# Altium PCB PCB1.PcbDoc
Units mm, origin at the board's own origin, x right, y up, seen from the top; angles counter-clockwise.
Board outline 39.68 x 41.13 mm, 2 copper layers (Top Layer, Bottom Layer), stack 2.036 mm thick; 33 components, 38 nets, 162 pads, 149 vias.
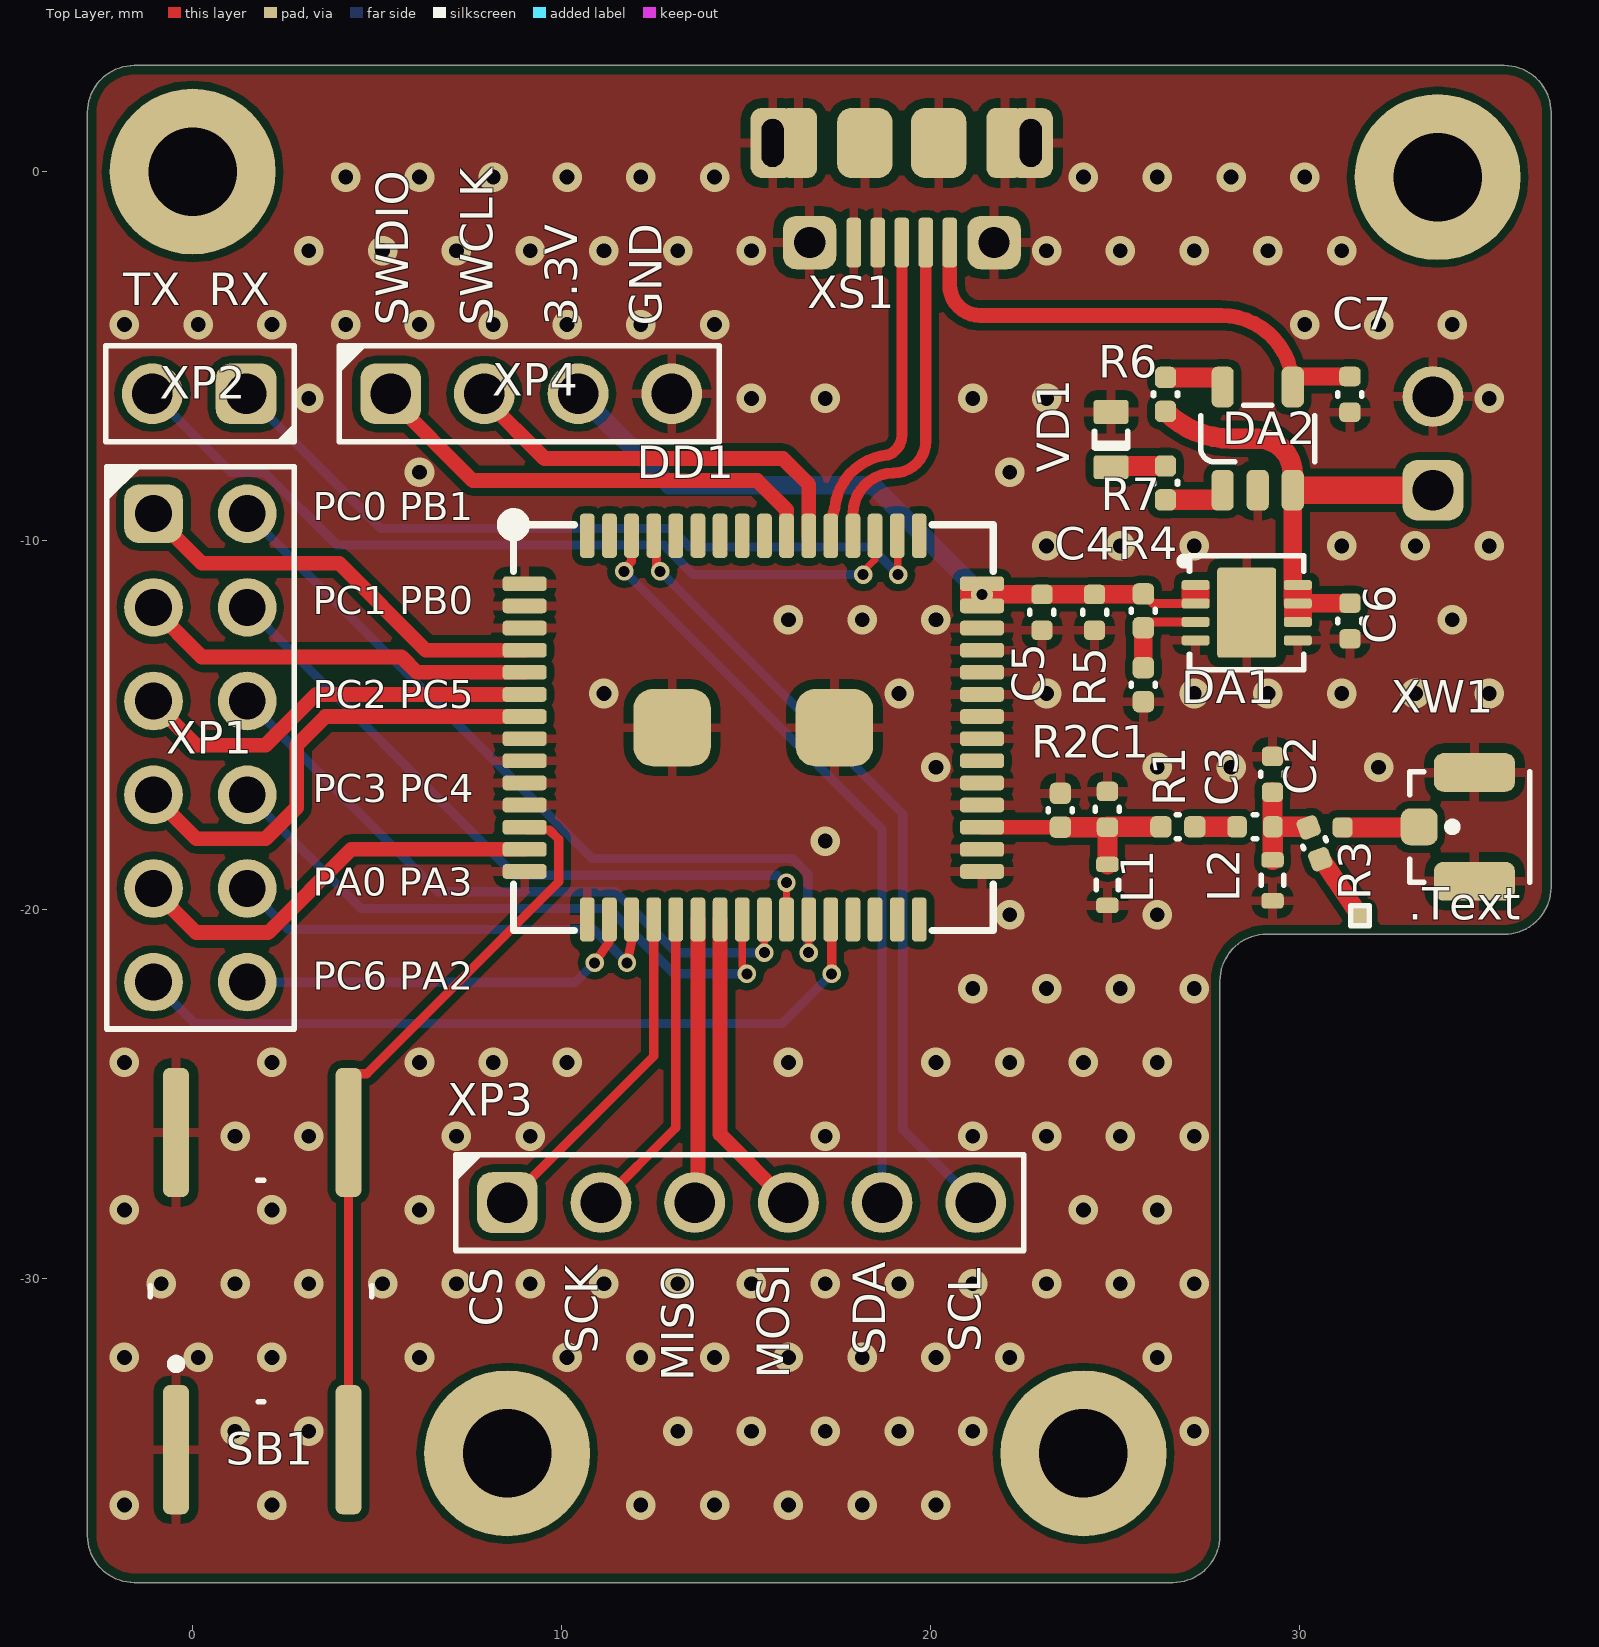
[diagram p0: Top Layer view]
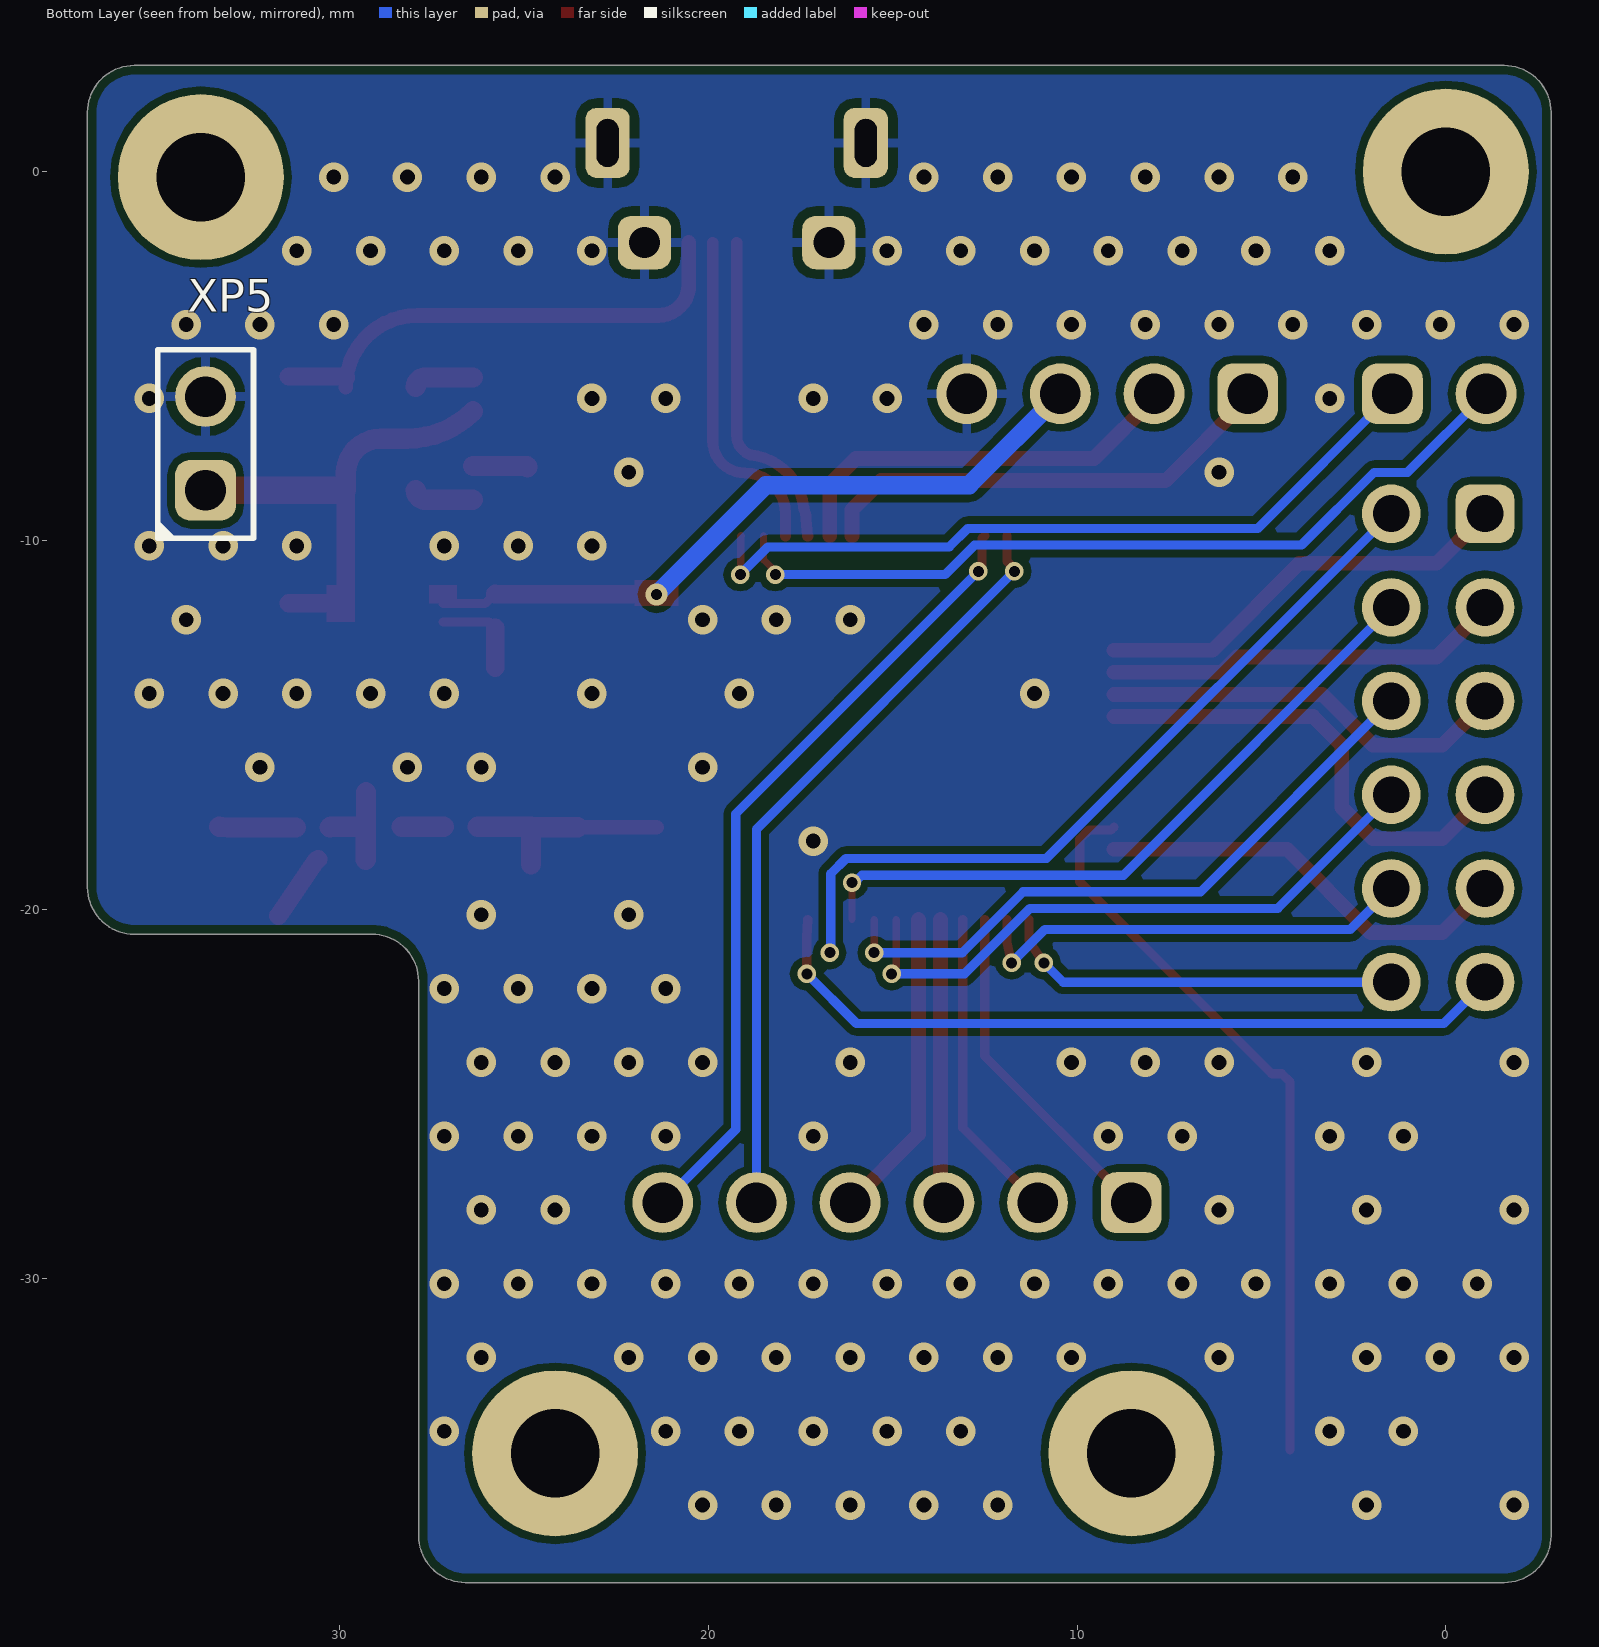
[diagram p1: Bottom Layer view, seen from below]
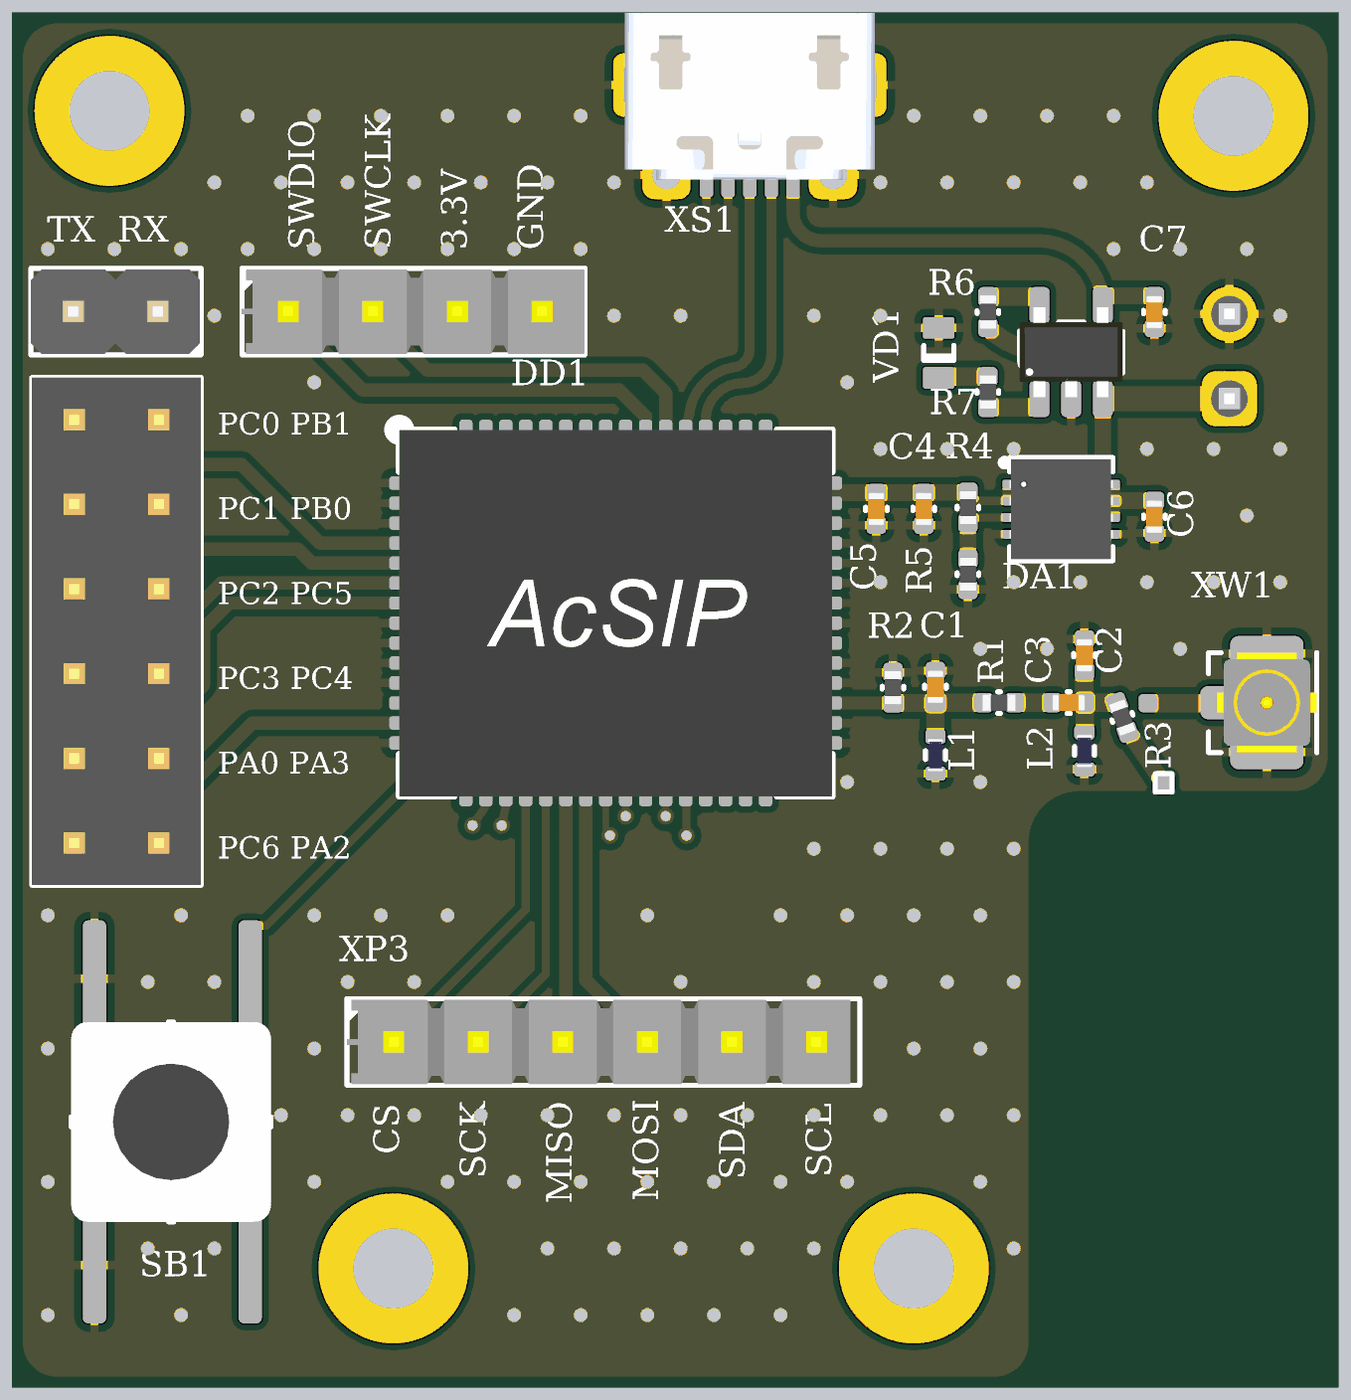
[diagram p2: 3D render of the assembled board from above, using the file's embedded part models]

## Layer stack, top to bottom
Top Solder: solder mask 0.035, Solder Resist, Dk 3.5
Top Layer: signal copper 0.018
Dielectric 1: core 2, FR4, Dk 4.6
Bottom Layer: signal copper 0.018
Bottom Solder: solder mask 0.035, Solder Resist, Dk 3.5

## Board outline
-1.58,-38.25 cw(c-1.58,-36.98) -2.85,-36.98 -2.85,1.605 cw(c-1.58,1.605) -1.58,2.875 35.555,2.875 cw(c35.555,1.605) 36.825,1.605 36.825,-19.405 cw(c35.555,-19.405) 35.555,-20.675 29.12,-20.675 ccw(c29.12,-21.945) 27.85,-21.945 27.85,-36.98 cw(c26.58,-36.98) 26.58,-38.25

## Design rules (kind name [scope] priority, off if disabled: settings)
BoardOutlineClearance SolderMask [OnSolderMask] p1: gap=0 ignorepadtopadclearanceinfootprint=FALSE except(0.25: Arc-CavityEdge Arc-SplitContinuation Track-CavityEdge Track-SplitContinuation SMDPad-CavityEdge SMDPad-SplitContinuation THPad-CavityEdge THPad-SplitContinuation Via-CavityEdge Via-SplitContinuation Fill-CavityEdge Fill-SplitContinuation Poly-CavityEdge Poly-SplitContinuation Region-CavityEdge Region-SplitContinuation Text-CavityEdge Text-SplitContinuation)
BoardOutlineClearance [All] p2: gap=0.25 ignorepadtopadclearanceinfootprint=FALSE
Clearance [All] p1: gap=0.2 ignorepadtopadclearanceinfootprint=FALSE
ComponentClearance [All] p1: gap=0.25 collisioncheckmode=3 verticalgap=0.25 showdistances=FALSE
DiffPairsRouting [All] p1: maxlimit=0.25 minlimit=0.25 mostfreqgap=0.25 toplayer_minwidth=0.2 toplayer_maxwidth=1 toplayer_prefwidth=0.4 bottomlayer_minwidth=0.2 bottomlayer_maxwidth=1 bottomlayer_prefwidth=0.4 maxuncoupledlength=10
HoleSize [All] p1: absolutevalues=TRUE maxlimit=8 minlimit=0.3 maxpercent=80.000 minpercent=20.000
HoleToHoleClearance [All] p1: gap=0.3 allowstackedmicrovias=TRUE
MinimumSolderMaskSliver [All] p1: minsoldermaskwidth=0.15
PlaneClearance [All] p1: clearance=0.5
PlaneConnect [All] p1: planeconnectstyle=Relief reliefexpansion=0.5 reliefentries=4 reliefconductorwidth=0.25 reliefairgap=0.25
PolygonConnect [All] p1: thpad.connectstyle=Relief thpad.reliefconductorwidth=0.25 thpad.reliefentries=4 thpad.polygonreliefangle="90 Angle" thpad.airgapwidth=0.25 smdpad.connectstyle=Relief smdpad.reliefconductorwidth=0.25 smdpad.reliefentries=4 smdpad.polygonreliefangle="90 Angle" smdpad.airgapwidth=0.25 via.connectstyle=Direct via.reliefconductorwidth=0.25 via.reliefentries=4 via.polygonreliefangle="90 Angle" via.airgapwidth=0.25
ReturnPath [All] p1: impedanceprofileid={2CF304FD-49DA-4276-8468-CD12DB598121} _gaplimit=0.5
RoomDefinition "МПСУ.464414.22-02 Sheet1" [InComponentClass('МПСУ.464414.22-02 Sheet1')] p1: confinementstyle=ConfineIn formatcopy=TRUE lockcomponents=FALSE outline -581.85,-718.15 -531.05,-718.15 -531.05,-692.75 -581.85,-692.75
RoutingCorners [All] p1: cornerstyle=45-Degree minsetback=2.5 maxsetback=2.5
RoutingVias [All] p1: holewidth=0.3 width=0.5 viastyle="Through Hole" minholewidth=0.3 minwidth=0.5 maxholewidth=1 maxwidth=1.5
SilkToSilkClearance [All] p1: silktosilkclearance=0.05
SilkToSolderMaskClearance [IsPad] p1: minsilkscreentomaskgap=0.05 clearancetoexposedcopper=TRUE
SolderMaskExpansion [All] p1: expansion=0.05 istentingtop=FALSE
UnRoutedNet [All] p1: checkbadconnections=TRUE
Width [All] p1: maxlimit=3 minlimit=0.2 preferedwidth=0.25
19 further rules are at their usual default settings.

## Classes and differential pairs
component class "МПСУ.464414.22-02 Sheet1": C1 C2 C3 C4 C5 C6 C7 DA1 DA2 DD1 L1 L2 R1 R2 R3 R4 R5 R6 R7 SB1 VD1 XP1 XP2 XP3 XP4 XP5 XS1 XW1

## Components (designator, comment, footprint, x,y, rotation, side; value= is the part's Value field where it differs from the comment)
C1 "TBD ± 0 % 0 В  0402" CAPC100X50X55L20N 24.8,-17.29 r90 top value=TBD
C2 "TBD ± 0 % 0 В  0402" CAPC100X50X55L20N 29.275,-16.34 r90 top value=TBD
C3 "56мкФ ± 0 % 0 В  0402" CAPC100X50X55L20N 28.8,-17.765 r180 top value=56мкФ
C4 "100 мкФ ± 0 % 0 В  0402" CAPC100X50X55L20N 24.45,-11.95 r90 top value="100 мкФ"
C5 "0.1 мкФ ± 0 % 0 В  0402" CAPC100X50X55L20N 23.025,-11.95 r270 top value="0.1 мкФ"
C6 "100 мкФ ± 0 % 0 В  0402" CAPC100X50X55L20N 31.375,-12.185 r270 top value="100 мкФ"
C7 "100 мкФ ± 0 % 0 В  0402" CAPC100X50X55L20N 31.374,-6.041 r90 top value="100 мкФ"
DA1 "LT1965*DD" SON9P50_300X300X80L40X25T244X160N 28.575,-11.96 r270 top
DA2 "MCP73831T-2ACI/OT" SOTFL95P270X145-5N 28.874,-7.241 r90 top
DD1 "" S7XS 15.2,-15.075 r0 top
L1 "TBD ± 0 % 0 А 0402" INDC100X50X60L10N 24.8,-19.34 r270 top value=TBD
L2 "TBD ± 0 % 0 А 0402" INDC100X50X60L10N 29.275,-19.215 r270 top value=TBD
R1 "0 Ом ± 0 % 0 Вт 0402" RESC100X50X40L25N 26.71,-17.765 r0 top value="0 Ом"
R2 "0 Ом ± 0 % 0 Вт 0402" RESC100X50X40L25N 23.525,-17.315 r90 top value="0 Ом"
R3 "0 Ом ± 0 % 0 Вт 0402" RESC100X50X40L25N 30.412,-18.212 r290 top value="0 Ом"
R4 "4,42 кОм ± 0 % 0 Вт 0402" RESC100X50X40L25N 25.775,-11.91 r270 top value="4,42 кОм"
R5 "3,01 кОм ± 0 % 0 Вт 0402" RESC100X50X40L25N 25.775,-13.91 r270 top value="3,01 кОм"
R6 "5 кОм ± 0 % 0 Вт 0402" RESC100X50X40L25N 26.374,-6.041 r270 top value="5 кОм"
R7 "470 Ом ± 0 % 0 Вт 0402" RESC100X50X40L25N 26.374,-8.441 r90 top value="470 Ом"
SB1 "" KLS7-TS6601 1.85,-30.35 r90 top
VD1 "KP-1608ZGC" KP-1608ZGC 24.899,-7.266 r90 top
X2 "Contact Pad" "Contact_Pad 0.55x0.55" 31.65,-20.175 r0 top
XP1 "DS1021-2x6SF11-B" HDRV12W64P254_6X2_1524X508H600 0.21,-15.625 r270 top
XP2 "TSW-102-07-G-S" TSW-102-07-G-S 1.45,-6.025 r180 top
XP3 "TSW-106-07-G-S" TSW-106-07-G-S 16.15,-27.95 r0 top
XP4 "TSW-104-07-G-S" TSW-104-07-G-S 9.18,-6.025 r0 top
XP5 "TSW-102-07-G-S" TSW-102-07-G-S 33.625,-8.64 r90 bottom
XS1 "10118194-0001LF" micro_USB_TH 19.225,0.175 r180 top
XW1 "U.FL-LP*" U.FL-LP 34.75,-17.765 r270 top
? "Comment" M2_Hole 24.15,-34.75 r0 top
? "Comment" M2_Hole 33.75,-0.15 r0 top
? "Comment" M2_Hole 0,0 r0 top
? "Comment" M2_Hole 8.525,-34.75 r0 top

## Footprints (in the part's own frame and the unit in brackets; to place one, negate y for a bottom-side part, rotate by r counter-clockwise, add the part's x,y. Pads: shape width x height; smd on the part's side, far side on the other; paste and mask are expansions set on the pad)
CAPC100X50X55L20N [mm] "Capacitor, Chip; 1.00 mm L X 0.50 mm W X 0.55 mm H body"
  rrect50% 0.53x0.58 smd: 1(-0.485,0) 2(0.485,0)
  silkscreen extent -0.05,-0.33 0.05,0.33, body extent -0.5,-0.25 0.5,0.25, height 0.55
"Contact_Pad 0.55x0.55" [mm]
  rrect50% 0.55x0.55 smd mask+0.1: 1(0,0)
  silkscreen extent -0.25,-0.28 0.25,0.28
HDRV12W64P254_6X2_1524X508H600 [mm] "Header, Vertical, 2.54 mm pitch; 0.64 mm lead width, 12 pins, 2 rows, 6 pins per row, 15.24 mm L X 5.08 mm W X 6.00 mm H body"
  rrect50% 1.59x1.59 hole 1: 1(-6.35,-1.27)
  round 1.59 hole 1: 2(-6.35,1.27) 3(-3.81,-1.27) 4(-3.81,1.27) 5(-1.27,-1.27) 6(-1.27,1.27) 7(1.27,-1.27) 8(1.27,1.27) 9(3.81,-1.27) 10(3.81,1.27) 11(6.35,-1.27) 12(6.35,1.27)
  silkscreen extent -7.62,-2.54 7.62,2.54, body extent -7.62,-2.54 7.62,2.54, height 6
INDC100X50X60L10N [mm] "Inductor, Chip; 1.00 mm L X 0.50 mm W X 0.60 mm H body"
  rrect50% 0.42x0.61 smd: 1(-0.555,0) 2(0.555,0)
  silkscreen extent -0.13,-0.3 0.13,0.3, body extent -0.5,-0.25 0.5,0.25, height 0.6
KLS7-TS6601 [mm] "Button"
  rrect50% 3.5x0.7 smd: 1(-4.3,2.3) 1(4.3,2.3) 2(-4.3,-2.376) 2(4.3,-2.376)
  silkscreen extent -3,-3 3,3, body extent -3,-3 3,3, height 13
KP-1608ZGC [mm] "SODFL, 2-Leads, Body 0,80x1,60mm, IPC Medium Density"
  rrect25% 0.65x0.95 smd: 1(-0.75,0) 2(0.75,0)
  silkscreen extent -0.3,-0.45 0.23,0.45, body extent -0.8,-0.37 0.8,0.38, height 1.1
M2_Hole [mm]
  round 4.5 / inner round 3.4 / far side round 4.5 hole 2.4: 1(0,0)
  body extent -1.9,-1.9 1.9,1.9, height 1.3
micro_USB_TH [mm]
  rrect50% 0.4x1.35 smd: 1(-1.3,2.1) 2(-0.65,2.1) 3(0,2.1) 4(0.65,2.1) 5(1.3,2.1)
  rrect50% 1.2x1.9 hole 1.3 slot 0.6 at 0 deg: 5(-3.5,-0.6) 5(3.5,-0.6)
  rrect50% 1x1.9 smd: 5(-2.8,-0.6) 5(2.8,-0.6)
  rrect50% 1.45x1.45 hole 0.85: 5(-2.5,2.1) 5(2.5,2.1)
  rrect50% 1.5x1.9 smd: 5(-1,-0.6) 5(1,-0.6)
  body extent -3.75,-2.77 3.75,2.24, height 2.64
RESC100X50X40L25N [mm] "Resistor, Chip; 1.00 mm L X 0.50 mm W X 0.40 mm H body"
  rrect50% 0.58x0.58 smd: 1(-0.46,0) 2(0.46,0)
  silkscreen extent -0.04,-0.33 0.04,0.33, body extent -0.5,-0.25 0.5,0.25, height 0.4
S7XS [mm] "S7XS"
  rrect50% 1.2x0.4 smd mask-0.05: 1(-6.2,3.9) 2(-6.2,3.3) 3(-6.2,2.7) 4(-6.2,2.1) 5(-6.2,1.5) 6(-6.2,0.9) 7(-6.2,0.3) 8(-6.2,-0.3) 9(-6.2,-0.9) 10(-6.2,-1.5) 11(-6.2,-2.1) 12(-6.2,-2.7) 13(-6.2,-3.3) 14(-6.2,-3.9) 31(6.2,-3.9) 32(6.2,-3.3) 33(6.2,-2.7) 34(6.2,-2.1) 35(6.2,-1.5) 36(6.2,-0.9) 37(6.2,-0.3) 38(6.2,0.3) 39(6.2,0.9) 40(6.2,1.5) 41(6.2,2.1) 42(6.2,2.7) 43(6.2,3.3) 44(6.2,3.9)
  rrect50% 0.4x1.2 smd mask-0.05: 15(-4.5,-5.2) 16(-3.9,-5.2) 17(-3.3,-5.2) 18(-2.7,-5.2) 19(-2.1,-5.2) 20(-1.5,-5.2) 21(-0.9,-5.2) 22(-0.3,-5.2) 23(0.3,-5.2) 24(0.9,-5.2) 25(1.5,-5.2) 26(2.1,-5.2) 27(2.7,-5.2) 28(3.3,-5.2) 29(3.9,-5.2) 30(4.5,-5.2) 45(4.5,5.2) 46(3.9,5.2) 47(3.3,5.2) 48(2.7,5.2) 49(2.1,5.2) 50(1.5,5.2) 51(0.9,5.2) 52(0.3,5.2) 53(-0.3,5.2) 54(-0.9,5.2) 55(-1.5,5.2) 56(-2.1,5.2) 57(-2.7,5.2) 58(-3.3,5.2) 59(-3.9,5.2) 60(-4.5,5.2)
  rrect50% 2.1x2.1 smd mask-0.05: 61(-2.2,0) 62(2.2,0)
  silkscreen extent -6.7,-5.5 6.5,5.7, body extent -6.5,-5.5 6.5,5.5, height 1.14
SON9P50_300X300X80L40X25T244X160N [mm] "Small Outline No-Lead (SON with Tab), 0.50 mm pitch; 8 pin, 3.00 mm L X 3.00 mm W X 0.80 mm H body"
  rrect50% 0.27x0.76 smd: 1(-0.75,-1.385) 2(-0.25,-1.385) 3(0.25,-1.385) 4(0.75,-1.385) 5(0.75,1.385) 6(0.25,1.385) 7(-0.25,1.385) 8(-0.75,1.385)
  rrect10% 2.44x1.6 smd: 9(0,0)
  silkscreen extent -1.55,-1.78 1.55,1.55, body extent -1.5,-1.55 1.5,1.55, height 0.8
SOTFL95P270X145-5N [mm] "SOTFL, 5-Leads, Body 2,90x2,70mm, Pitch 0,95mm, IPC Medium Density"
  rrect50% 1.1x0.6 smd: 1(-1.4,0.95) 2(-1.4,0) 3(-1.4,-0.95) 4(1.4,-0.95) 5(1.4,0.95)
  silkscreen extent -0.63,-1.55 0.9,1.55, body extent -1.35,-1.55 1.35,1.55, height 1.45
TSW-102-07-G-S [mm]
  rrect50% 1.65x1.65 hole 1.1: 1(0,0)
  round 1.65 hole 1.1: 2(2.54,0)
  silkscreen extent -1.3,-1.3 3.81,1.3, body extent -1.27,-1.27 3.81,1.27, height 8.38
TSW-104-07-G-S [mm]
  rrect50% 1.65x1.65 hole 1.1: 1(-3.81,0)
  round 1.65 hole 1.1: 2(-1.27,0) 3(1.27,0) 4(3.81,0)
  silkscreen extent -5.2,-1.3 5.1,1.3, body extent -5.21,-1.27 5.08,1.27, height 8.38
TSW-106-07-G-S [mm]
  rrect50% 1.65x1.65 hole 1.1: 1(-7.62,0)
  round 1.65 hole 1.1: 2(-5.08,0) 3(-2.54,0) 4(0,0) 5(2.54,0) 6(5.08,0)
  silkscreen extent -9.02,-1.3 6.38,1.3, body extent -9.02,-1.27 6.1,1.27, height 8.38
U.FL-LP [mm]
  rrect50% 1x1 smd: 1(0,-1.5)
  rrect50% 1.05x2.2 smd: 2(-1.475,0) 2(1.475,0)
  silkscreen extent -1.5,-1.75 1.5,1.5, body extent -1.5,-1.5 1.5,1.5, height 1.25

## Part data
C1 C2 C3 C4 C5 C6 C7: library part "C 0402", "Capacitor 0402", Package=0402, Tolerance="0 %", 3D_Body=+, Category=Passive, Designer=Свидерский, Peak_Condition="0 В", Status=Approved, Subcategory=Capacitor
DA1: "1.1A, Low Noise,  Low Dropout Linear Regulator", Manufacturer="Analog Devices", Package="8-LEAD (3mm × 3mm) PLASTIC DFN", 3D_Body=+, Category=IC, ComponentLink1Description="Техническое описание", ComponentLink1URL=Q:\Libs\Descriptions_PDF\LT1965.pdf, Designer=Свидерский, PartNumber=LT1965*DD, Status=Approved, Subcategory="Power Supply"
DA2: library part MCP7383*, "Miniature Single-Cell, Fully Integrated Li-Ion, / Li-Polymer Charge Management Controllers", Manufacturer=Microchip, 3D_Body=+, Category=IC, ComponentLink1Description="Техническое описание", ComponentLink1URL=Q:\Libs\Descriptions_PDF\KLS7-TS6601.pdf, Designer=Лазба, PartNumber=MCP73831T-2ACI/OT, Status=Check, Subcategory="Power Supply"
DD1: library part S76S, "The S76S is designed & manufactured in a smallest form factor - SiP ( System in Package ). It integrate with Semtech SX1276 and a 32-bit ultra low power Cortex M0L MCU ( STM32L073x ), supporting global 863MHz ~ 928MHz ISM-Bands.", Manufacturer=AcSIP, 3D_Body=+, Category=IC, ComponentLink1Description="Техническое описание", ComponentLink1URL="Q:\Libs\Descriptions_PDF\AcSIP S76S.pdf", Designer=Лазба, PartNumber=S76S, Status=Check, Subcategory=MCU
L1 L2: library part "L 0402", "Inductor 0402", Package=0402, Tolerance="0 %", 3D_Body=+, Category=Passive, Designer=Свидерский, Peak_Condition="0 А", Status=Approved, Subcategory=Inductor
R1 R2 R3 R4 R5 R6 R7: library part "R 0402", "Resistor 0402", Package=0402, Tolerance="0 %", 3D_Body=+, Category=Passive, Designer=Свидерский, Peak_Condition="0 Вт", Status=Approved, Subcategory=Resistor
SB1: library part KLS7-TS6601*, "6x6 Tact Switch Series", Manufacturer="KLS electronic co ltd", 3D_Body=+, Category=Passive, ComponentLink1Description="Техническое описание", ComponentLink1URL=Q:\Libs\Descriptions_PDF\KLS7-TS6601.pdf, Designer=Лазба, PartNumber=KLS7-TS6601*, Status=Check, Subcategory=Button
VD1: library part KP-1608***, "1.6X0.8mm SMD CHIP LED LAMP", Manufacturer=Kingbright, Package="1.6mmX0.8mm SMD LED", 3D_Body=+, Category=Discrete, ComponentLink1Description="Техническое описание", ComponentLink1URL=Q:\Libs\Descriptions_PDF\KP-1608ZGC.pdf, Designer=Ушакова, PartNumber=KP-1608ZGC, Status=Approved, Subcategory=Diode
X2: "Контактная площадка (1,5 х 1,5 мм) для запайки провода", 3D_Body=+, Category=Primitive, Designer=Свидерский, Status=Approved, Subcategory=Pad
XP1: "Вилка 2,54мм", Manufacturer="Connfly Electronic", 3D_Body=+, Category=Connector, ComponentLink1Description="Техническое описание", ComponentLink1URL=Q:\Libs\Descriptions_PDF\DS1021.pdf, Designer=Свидерский, PartNumber=DS1021-2x6SF11-B, Pins=2x6, Pitch=2.54mm, Status=Approved, Subcategory=Male, System=Connector
XP2 XP5: "2x1 Вилка 2,54 мм", Manufacturer=Samtec, 3D_Body=+, Category=Connector, ComponentLink1Description="Техническое описание", ComponentLink1URL=Q:\Libs\Descriptions_PDF\tsw_th.pdf, Designer=Погорельский, PartNumber=TSW-102-07-G-S, Pins=2х1, Pitch=2.54mm, Status=Check, Subcategory=Male, System=Connector
XP3 XP4: "Вилка 2,54 мм", Manufacturer=Samtec, 3D_Body=+, Category=Connector, ComponentLink1Description="Техническое описание", ComponentLink1URL=Q:\Libs\Descriptions_PDF\tsw_th.pdf, Pitch=2.54mm, Status=Check, Subcategory=Male, System=Connector
  XP3: Designer=Лазба, PartNumber=TSW-106-07-G-S, Pins=1x6
  XP4: Designer=Затонская, PartNumber=TSW-104-07-G-S, Pins=1x4
XS1: "micro USB, Through Hole Mount", Manufacturer="Amphenal ICC", 3D_Body=+, Category=Connector, ComponentLink1Description="Техническое описание", ComponentLink1URL=Q:\Libs\Descriptions_PDF\10118194-0001LF.pdf, Designer=Свидерский, PartNumber=10118194-0001LF, Pins=5, Pitch=-, Status=Approved, Subcategory=microUSB, System=Connector
XW1: library part U.FL-R-SMT, "RF connector, Right Angle Jack PCB SMA Female End Launch Connector", Manufacturer="Hirose Electric", 3D_Body=+, Category=Connector, ComponentLink1Description="Техническое описание", ComponentLink1URL=Q:\Libs\Descriptions_PDF\32K243-40ML5.pdf, Designer=Лазба, PartNumber=U.FL-LP*, Pins=UFL, Status=Check, Subcategory=RF, System=Connector

## Free pads (board coordinates)
  rrect50% 0.55x0.55 smd: 1(31.175,-17.78)

## Via types
v1: diameter 0.8, hole 0.4, Top Layer to Bottom Layer, tented both sides, 137 vias
v2: diameter 0.5, hole 0.3, Top Layer to Bottom Layer, tented both sides, 11 vias
v3: diameter 0.6, hole 0.3, Top Layer to Bottom Layer, tented both sides, 1 vias

## Nets (pads, with @x,y where several pads share a name; then routed paths per layer and width w, separated by ;. In a path a pad name is that pad's centre, name@x,y a point inside that pad or via, vN(x,y) a via of type N, cw(c..) or ccw(c..) an arc to the next point about the centre after c; other vN are vias at no path point)
ACC_V: C6.1 DA1.6 DA1.7 DA1.8 DA2.3 R6.2 XP5.1 | length 12.6
  Top Layer w0.2: DA1.7 DA1.7@29.965,-11.705 ; C6.1@31.37,-11.705 C6.1
  Top Layer w0.5: DA2.3 29.824,-10.507 29.825,-10.508 DA1.7@29.825,-11.71 ; DA1.7@29.965,-11.705 C6.1@31.37,-11.705
  Top Layer w0.55: R6.2 ccw(c28.16,-4.715) 28.16,-7.241 28.874,-7.241 cw(c28.874,-8.191) 29.824,-8.191 DA2.3
  Top Layer w0.75: 30.124,-8.64 XP5.1
GND: C1.2 C2.2 C4.1 C5.2 C6.2 C7.1 DA1.4 DA1.5 DA1.9 DA2.2 DD1.1 DD1.2 DD1.3 DD1.8 DD1.9 DD1.10 DD1.11 DD1.14 DD1.15 DD1.31 DD1.32 DD1.34 DD1.35 DD1.37 DD1.38 DD1.39 DD1.40 DD1.41 DD1.42 DD1.61 DD1.62 L1.2 L2.2 R2.2 R5.2 SB1.1 VD1.2 XP4.4 XP5.2 XS1.4 XS1.5 XW1.2
  other v1: -1.85,-36.15 2.15,-36.15 12.15,-36.15 14.15,-36.15 16.15,-36.15 18.15,-36.15 20.15,-36.15 1.15,-34.15 3.15,-34.15 13.15,-34.15 15.15,-34.15 17.15,-34.15 19.15,-34.15 21.15,-34.15 27.15,-34.15 -1.85,-32.15 0.15,-32.15 2.15,-32.15 6.15,-32.15 10.15,-32.15 12.15,-32.15 14.15,-32.15 16.15,-32.15 18.15,-32.15 20.15,-32.15 22.15,-32.15 26.15,-32.15 -0.85,-30.15 1.15,-30.15 3.15,-30.15 5.15,-30.15 7.15,-30.15 9.15,-30.15 11.15,-30.15 13.15,-30.15 15.15,-30.15 17.15,-30.15 19.15,-30.15 21.15,-30.15 23.15,-30.15 25.15,-30.15 27.15,-30.15 -1.85,-28.15 2.15,-28.15 6.15,-28.15 24.15,-28.15 26.15,-28.15 1.15,-26.15 3.15,-26.15 7.15,-26.15 9.15,-26.15 17.15,-26.15 21.15,-26.15 23.15,-26.15 25.15,-26.15 27.15,-26.15 -1.85,-24.15 2.15,-24.15 6.15,-24.15 8.15,-24.15 10.15,-24.15 16.15,-24.15 20.15,-24.15 22.15,-24.15 24.15,-24.15 26.15,-24.15 21.15,-22.15 23.15,-22.15 25.15,-22.15 27.15,-22.15 22.15,-20.15 26.15,-20.15 17.15,-18.15 20.15,-16.15 26.15,-16.15 28.15,-16.15 32.15,-16.15 11.15,-14.15 19.15,-14.15 23.15,-14.15 27.15,-14.15 29.15,-14.15 31.15,-14.15 33.15,-14.15 35.15,-14.15 16.15,-12.15 18.15,-12.15 20.15,-12.15 34.15,-12.15 23.15,-10.15 25.15,-10.15 27.15,-10.15 31.15,-10.15 33.15,-10.15 35.15,-10.15 6.15,-8.15 22.15,-8.15 3.15,-6.15 15.15,-6.15 17.15,-6.15 21.15,-6.15 23.15,-6.15 35.15,-6.15 -1.85,-4.15 0.15,-4.15 2.15,-4.15 4.15,-4.15 6.15,-4.15 8.15,-4.15 10.15,-4.15 12.15,-4.15 14.15,-4.15 30.15,-4.15 32.15,-4.15 34.15,-4.15 3.15,-2.15 5.15,-2.15 7.15,-2.15 9.15,-2.15 11.15,-2.15 13.15,-2.15 15.15,-2.15 23.15,-2.15 25.15,-2.15 27.15,-2.15 29.15,-2.15 31.15,-2.15 4.15,-0.15 6.15,-0.15 8.15,-0.15 10.15,-0.15 12.15,-0.15 14.15,-0.15 24.15,-0.15 26.15,-0.15 28.15,-0.15 30.15,-0.15
NetC1_1: C1.1 DD1.33 L1.1 R1.1 R2.1 | length 5.9
  Top Layer w0.4: DD1.33 R2.1
  Top Layer w0.55: R2.1 C1.1 L1.1 ; C1.1@24.8,-17.765 R1.1
NetC2_1: C2.1 C3.1 L2.1 R3.1 | length 2.8
  Top Layer w0.55: L2.1 29.285,-18.66 C3.1 ; C2.1 29.275,-17.765 C3.1 ; R3.1 30.24,-17.765 C3.1
NetC3_2: C3.2 R1.2 | length 1.1
  Top Layer w0.55: R1.2 C3.2
NetC7_2: C7.2 DA2.4 XS1.1 | length 13.9
  Top Layer w0.4: XS1.1 20.525,-3.075 ccw(c21.35,-3.075) 21.35,-3.9 27.883,-3.9 cw(c27.883,-5.841) DA2.4 DA2.4@29.824,-5.591
  Top Layer w0.5: DA2.4@29.824,-5.591 29.824,-5.556 C7.2
NetDA1_3: DA1.3 R4.2 R5.1 | length 2.6
  Top Layer w0.25: R4.2 25.935,-12.21 DA1.3
  Top Layer w0.5: R5.1 R4.2
NetDA2_1: DA2.1 R7.1 | length 1.7
  Top Layer w0.55: R7.1 27.664,-8.901 ccw(c27.664,-8.641) DA2.1
NetDA2_5: DA2.5 R6.1 | length 1.7
  Top Layer w0.55: R6.1 27.664,-5.581 cw(c27.664,-5.841) DA2.5
NetDD1_4: DD1.4 XP1.1 | length 11.6
  Top Layer w0.4: XP1.1@-1.095,-9.275 0.25,-10.62 3.97,-10.62 6.325,-12.975 DD1.4
NetDD1_5: DD1.5 XP1.3 | length 10.8
  Top Layer w0.4: XP1.3@-1.095,-11.815 0.25,-13.16 5.661,-13.16 6.076,-13.575 DD1.5
NetDD1_6: DD1.6 XP1.5 | length 11.2
  Top Layer w0.4: XP1.5@-1.095,-14.355 0.1,-15.55 1.975,-15.55 3.35,-14.175 8.541,-14.175 8.751,-14.175 DD1.6
NetDD1_7: DD1.7 XP1.7 | length 13
  Top Layer w0.4: XP1.7@-1.095,-16.895 0.1,-18.09 1.975,-18.09 2.825,-17.24 2.825,-15.549 3.599,-14.775 DD1.7
NetDD1_12: DD1.12 SB1.2 | length 20.1
  Top Layer w0.25: SB1.2@4.226,-34.65 4.226,-26.05 4.226,-24.677 4.447,-24.456 4.72,-24.456 9.925,-19.251 9.925,-18.099 9.676,-17.85 9.075,-17.85 DD1.12
NetDD1_13: DD1.13 XP1.9 | length 11.5
  Top Layer w0.4: XP1.9@-1.095,-19.435 0.1,-20.63 2.045,-20.63 4.3,-18.375 DD1.13
NetDD1_18: DD1.18 XP3.1 | length 9.3
  Top Layer w0.25: XP3.1 12.5,-23.98 DD1.18
NetDD1_19: DD1.19 XP3.2 | length 8.5
  Top Layer w0.25: XP3.2 13.1,-25.92 DD1.19
NetDD1_20: DD1.20 XP3.3 | length 7.7
  Top Layer w0.4: XP3.3 13.7,-27.86 DD1.20
NetDD1_21: DD1.21 XP3.4 | length 8.4
  Top Layer w0.4: DD1.21 14.3,-20.734 14.3,-26.1 XP3.4
NetDD1_46: DD1.46 XP2.1 | length 20.8
  Top Layer w0.2: DD1.46 19.112,-9.888 19.112,-10.912 v2(19.125,-10.925)
  Bottom Layer w0.25: XP2.1 5.1,-9.675 12.962,-9.675 13.462,-10.175 18.375,-10.175 v2(19.125,-10.925)
NetDD1_47: DD1.47 XP2.2 | length 22.5
  Top Layer w0.2: v2(18.175,-10.925) 18.175,-10.844 18.5,-10.519 DD1.47
  Bottom Layer w0.25: XP2.2 1.04,-8.155 1.944,-8.155 3.914,-10.125 12.776,-10.125 13.576,-10.925 v2(18.175,-10.925)
NetDD1_57: DD1.57 XP3.6 | length 21.7
  Top Layer w0.25: DD1.57 12.575,-9.95 12.575,-10.67 12.675,-10.77 v2(12.675,-10.838)
  Bottom Layer w0.25: v2(12.675,-10.838) 19.25,-17.413 19.25,-25.97 XP3.6
NetDD1_58: DD1.58 XP3.5 | length 21.1
  Top Layer w0.25: v2(11.697,-10.838) 11.697,-10.77 11.9,-10.567 DD1.58
  Bottom Layer w0.25: v2(11.697,-10.838) 18.69,-17.83 XP3.5
NetR3_2: R3.2 X2.1 | length 1.9
  Top Layer w0.5: R3.2 30.621,-18.668 31.625,-20.15 X2.1
NetR7_2: R7.2 VD1.1 | length 1.5
  Top Layer w0.55: VD1.1 cw(c24.934,-8.016) 24.934,-7.981 R7.2
NetX1_1: pad.1 XW1.1 | length 2.1
  Top Layer w0.55: pad.1 33.025,-17.78 XW1.1
PA2: DD1.16 XP1.12 | length 10.9
  Top Layer w0.25: v2(10.9,-21.45) 11.255,-20.939 ccw(c11.05,-20.797) 11.3,-20.797 11.3,-20.75 DD1.16
  Bottom Layer w0.25: XP1.12 10.375,-21.975 v2(10.9,-21.45)
PA3: DD1.17 XP1.10 | length 12.3
  Top Layer w0.25: v2(11.775,-21.45) 11.894,-20.901 ccw(c11.65,-20.848) 11.9,-20.848 11.9,-20.75 DD1.17
  Bottom Layer w0.25: XP1.10 2.59,-20.545 10.87,-20.545 v2(11.775,-21.45)
PB0: DD1.24 XP1.4 | length 18.7
  Top Layer w0.2: DD1.24 v2(16.1,-19.275)
  Bottom Layer w0.25: XP1.4 8.74,-19.075 15.832,-19.075 16.032,-19.275 v2(16.1,-19.275)
PB1: DD1.25 XP1.2 | length 22.3
  Top Layer w0.2: v2(16.7,-21.175) DD1.25
  Bottom Layer w0.25: XP1.2 10.83,-18.625 16.263,-18.625 16.675,-19.037 16.675,-21.15 v2(16.7,-21.175)
PC4: DD1.22 XP1.8 | length 17.1
  Top Layer w0.2: DD1.22 14.9,-21.544 15.025,-21.669 v2(15.025,-21.75)
  Bottom Layer w0.25: XP1.8 4.56,-19.975 11.275,-19.975 13.05,-21.75 v2(15.025,-21.75)
PC5: DD1.23 XP1.6 | length 17.7
  Top Layer w0.2: v2(15.5,-21.175) DD1.23
  Bottom Layer w0.25: XP1.6 6.65,-19.525 11.461,-19.525 13.111,-21.175 v2(15.5,-21.175)
PC6: DD1.26 XP1.11 | length 20.9
  Top Layer w0.25: DD1.26 17.325,-20.75 v2(17.325,-21.75)
  Bottom Layer w0.25: XP1.11 0.06,-23.095 15.98,-23.095 v2(17.325,-21.75)
SWCLK: DD1.50 XP4.2 | length 11.2
  Top Layer w0.4: XP4.2@7.91,-6.15 9.539,-7.779 16.004,-7.779 16.7,-8.475 DD1.50
SWDIO: DD1.51 XP4.1 | length 12.7
  Top Layer w0.4: XP4.1@5.37,-6.15 7.599,-8.379 15.311,-8.379 16.1,-9.168 DD1.51
USB_DM: DD1.48 XS1.2 | length 9.1
  Top Layer w0.3: DD1.48 17.9,-9.275 cw(c19,-9.275) 19,-8.175 ccw(c19,-7.3) 19.875,-7.3 XS1.2
USB_DP: DD1.49 XS1.3 | length 8.9
  Top Layer w0.3: DD1.49 17.35,-9.425 17.35,-9.375 cw(c17.8,-9.375) 17.386,-9.198 ccw(c17.11,-9.081) 17.408,-9.112 cw(c19,-9.275) 18.672,-7.709 cw(c19,-9.275) 18.808,-7.687 ccw(c18.771,-7.389) 18.886,-7.666 ccw(c18.672,-7.156) 19.225,-7.156 XS1.3
VDD33: C4.2 C5.1 DA1.1 DA1.2 DD1.43 DD1.44 R4.1 XP4.3 | length 19.1
  Top Layer w0.25: R4.1 25.786,-11.45 26.046,-11.71 DA1.2
  Top Layer w0.5: v3(21.4,-11.465) C5.1 C4.2 24.458,-11.457 25.767,-11.457 R4.1
  Bottom Layer w0.5: XP4.3 12.925,-8.5 18.435,-8.5 v3(21.4,-11.465)
pads on no net: ?.1 DD1.27 DD1.28 DD1.29 DD1.30 DD1.36 DD1.45 DD1.52 DD1.53 DD1.54 DD1.55 DD1.56 DD1.59 DD1.60

## Polygon pours and split planes (outlines as drawn)
GND on Bottom Layer "GND_L02_P001" (solid, pour order 1): -1.58,-38.25 cw(c-1.58,-36.98) -2.85,-36.98 -2.85,1.605 cw(c-1.58,1.605) -1.58,2.875 35.555,2.875 cw(c35.555,1.605) 36.825,1.605 36.825,-20.225 cw(c36.375,-20.225) 36.375,-20.675 28.75,-20.675 ccw(c28.75,-21.575) 27.85,-21.575 27.85,-36.98 cw(c26.58,-36.98) 26.58,-38.25
GND on Top Layer "GND_L01_P000" (solid, pour order 0): -1.58,-38.25 cw(c-1.58,-36.98) -2.85,-36.98 -2.85,1.605 cw(c-1.58,1.605) -1.58,2.875 35.555,2.875 cw(c35.555,1.605) 36.825,1.605 36.825,-20.225 cw(c36.375,-20.225) 36.375,-20.675 28.75,-20.675 ccw(c28.75,-21.575) 27.85,-21.575 27.85,-36.98 cw(c26.58,-36.98) 26.58,-38.25

## Other copper
Top Layer:
  rectangle net VDD33: 20.8,-11.775 22,-11.075
  rectangle net VDD33: 26.81,-11.71 27.57,-11.21
  rectangle net ACC_V: 29.58,-12.21 30.34,-11.21

## Silkscreen, mask and mechanical layers (free items; w line width, h text height)
Top Overlay:
  text "TX  RX" at -1.875,-3.925 h1.5
  text "SWDIO" at 6.139,-4.175 h1.5 r90
  text "SWCLK" at 8.431,-4.175 h1.5 r90
  text "3.3V" at 10.722,-4.175 h1.5 r90
  text "GND" at 13.014,-4.175 h1.5 r90
  text "PC0 PB1" at 3.25,-9.715 h1.3
  text "PC1 PB0" at 3.25,-12.26 h1.3
  text "PC2 PC5" at 3.25,-14.805 h1.3
  text "PC3 PC4" at 3.25,-17.35 h1.3
  text "PA0 PA3" at 3.25,-19.895 h1.3
  text "PC6 PA2" at 3.25,-22.44 h1.3
  text "CS" at 8.689,-31.322 h1.5 r90
  text "SCL" at 21.664,-32.005 h1.5 r90
  text "SCK" at 11.284,-32.043 h1.5 r90
  text "SDA" at 19.069,-32.086 h1.5 r90
  text "MOSI" at 16.474,-32.728 h1.5 r90
  text "MISO" at 13.879,-32.8 h1.5 r90
Board Outline:
  lines w0.15: 29.12,-20.675 ccw(c29.12,-21.945) 27.85,-21.945 27.85,-21.95 27.85,-36.98 cw(c26.58,-36.98) 26.58,-38.25 -1.58,-38.25 cw(c-1.58,-36.98) -2.85,-36.98 -2.85,1.605 cw(c-1.58,1.605) -1.58,2.875 35.555,2.875 cw(c35.555,1.605) 36.825,1.605 36.825,-18.95 36.825,-19.4 36.825,-19.405 cw(c35.555,-19.405) 35.555,-20.675 ; 29.125,-20.675 35.55,-20.675